# Altium PCB PCB1.PcbDoc
Units mil, origin at the board's own origin, x right, y up, seen from the top; angles counter-clockwise.
Board outline 6000 x 4000 mil, 2 copper layers (Top Layer, Bottom Layer); 185 components, 0 nets, 592 pads, 17 vias.
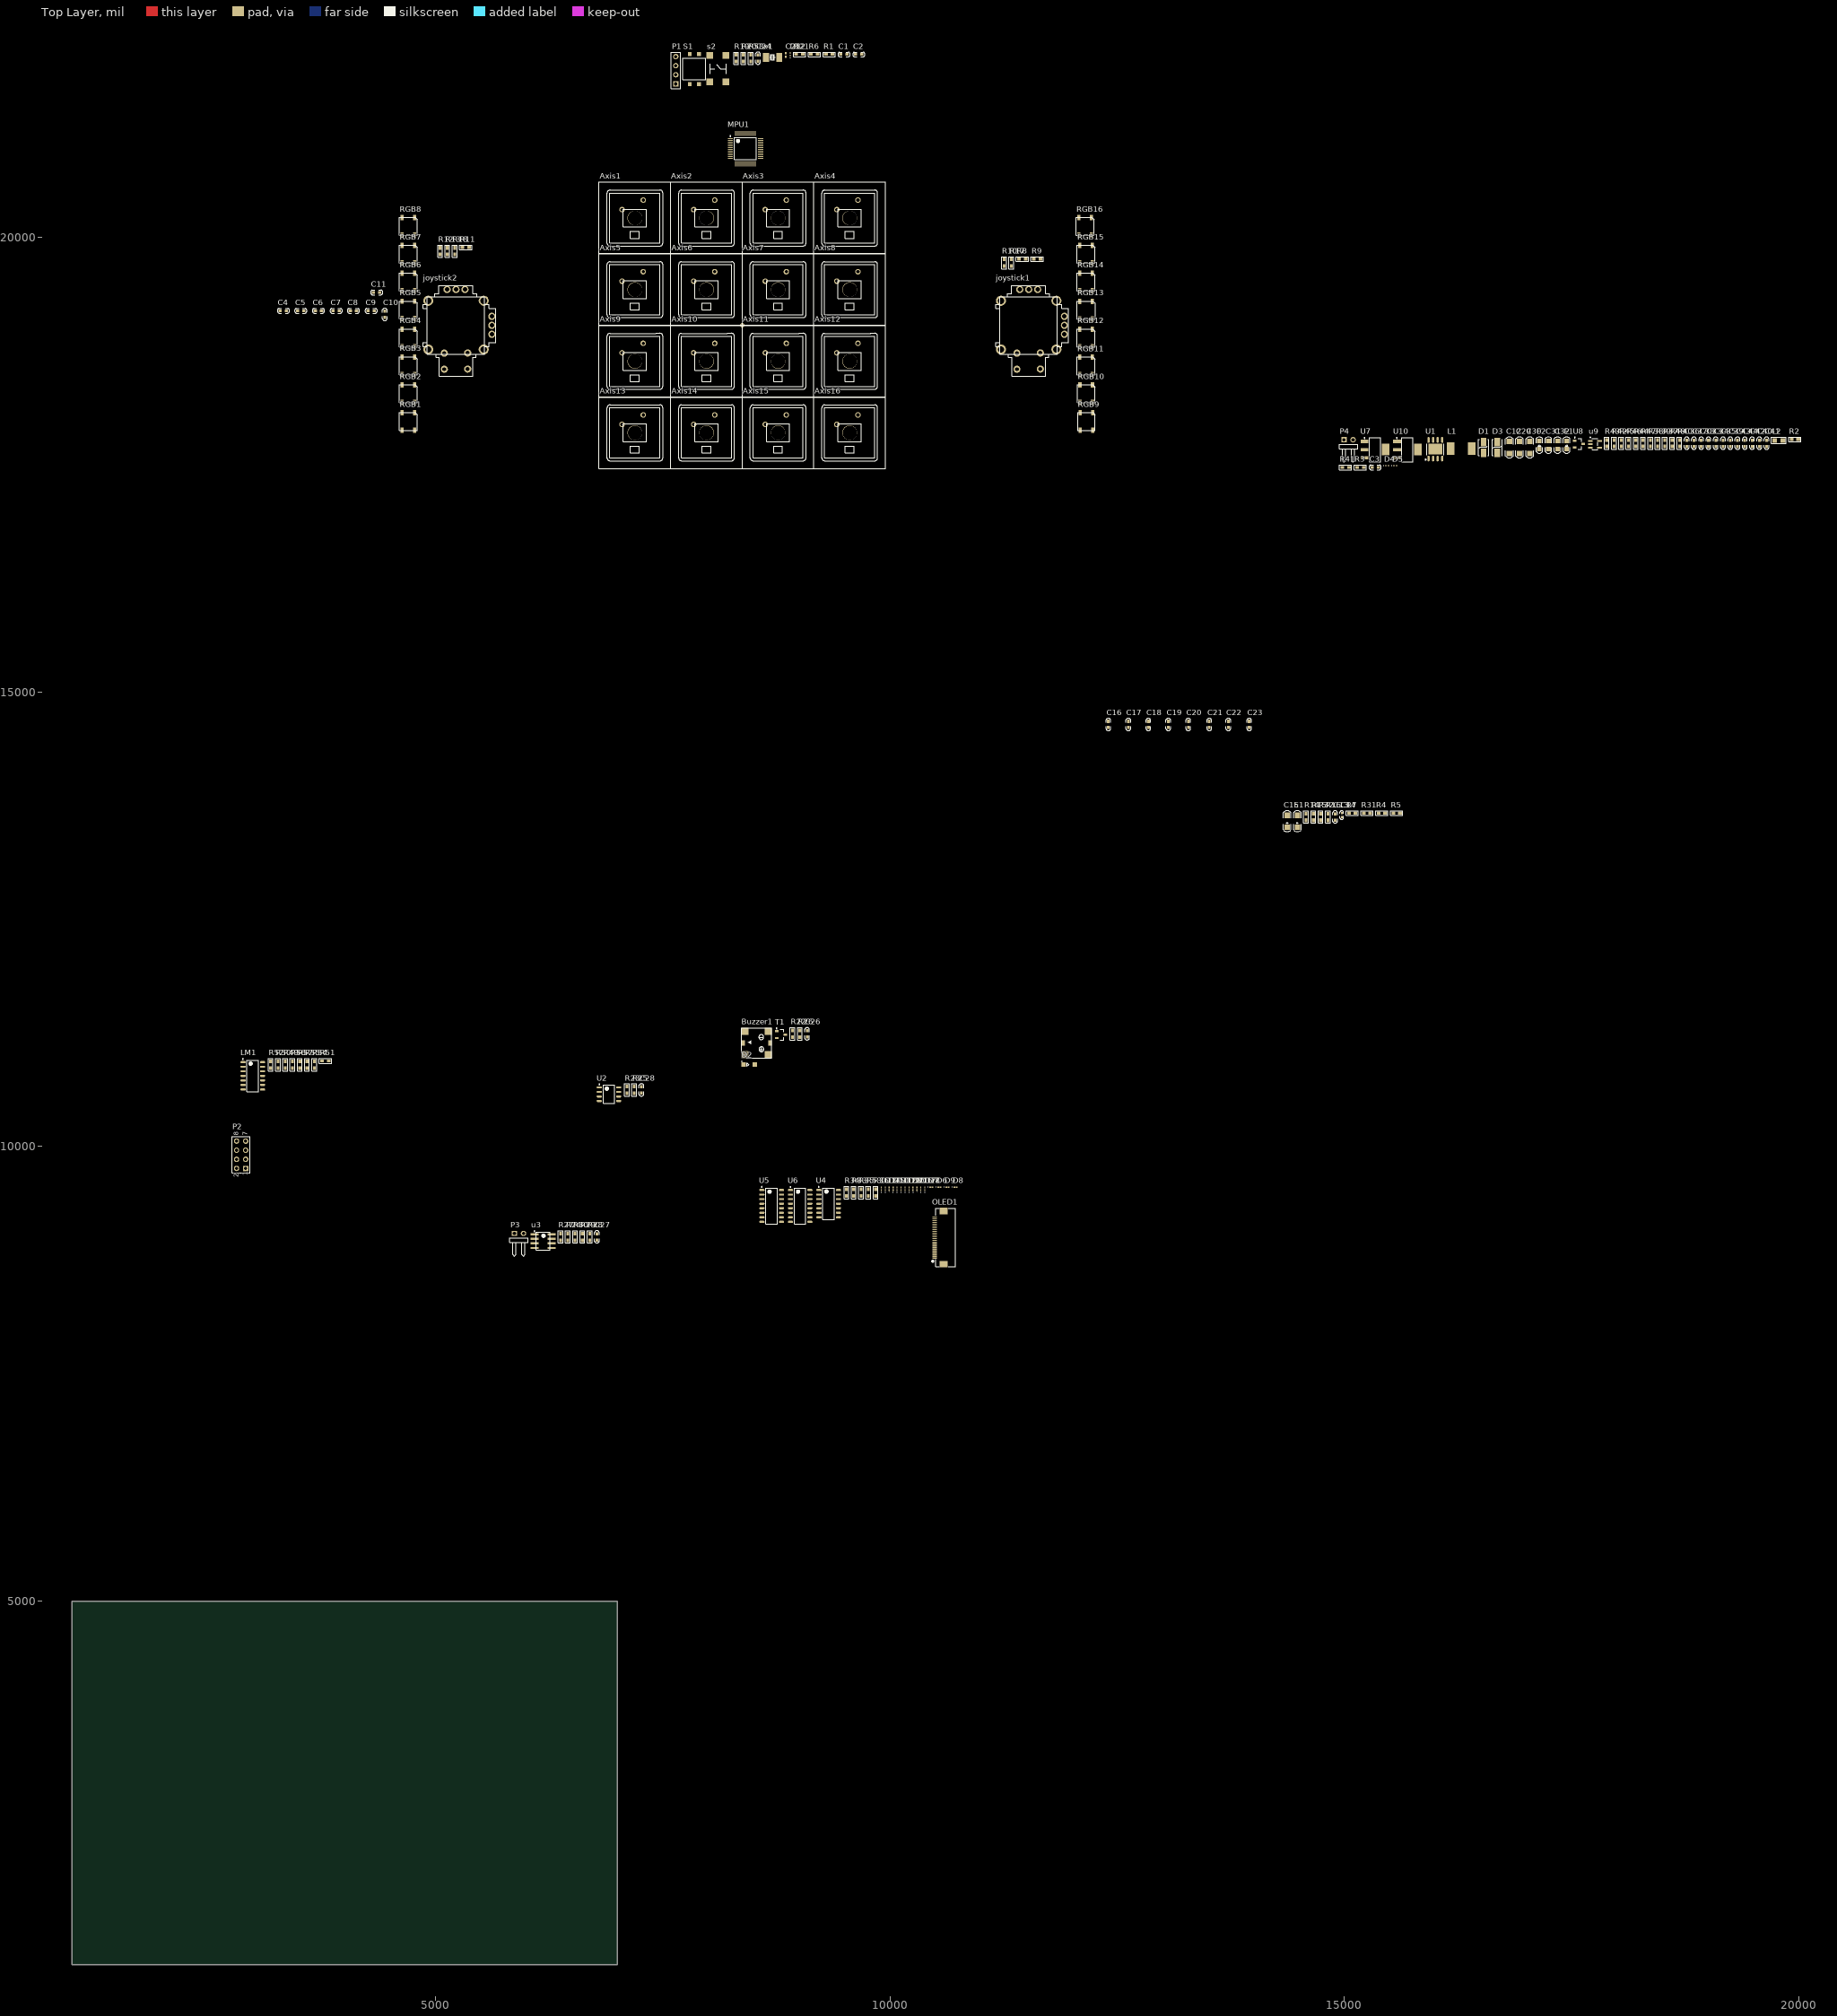
[diagram p0: Top Layer view]
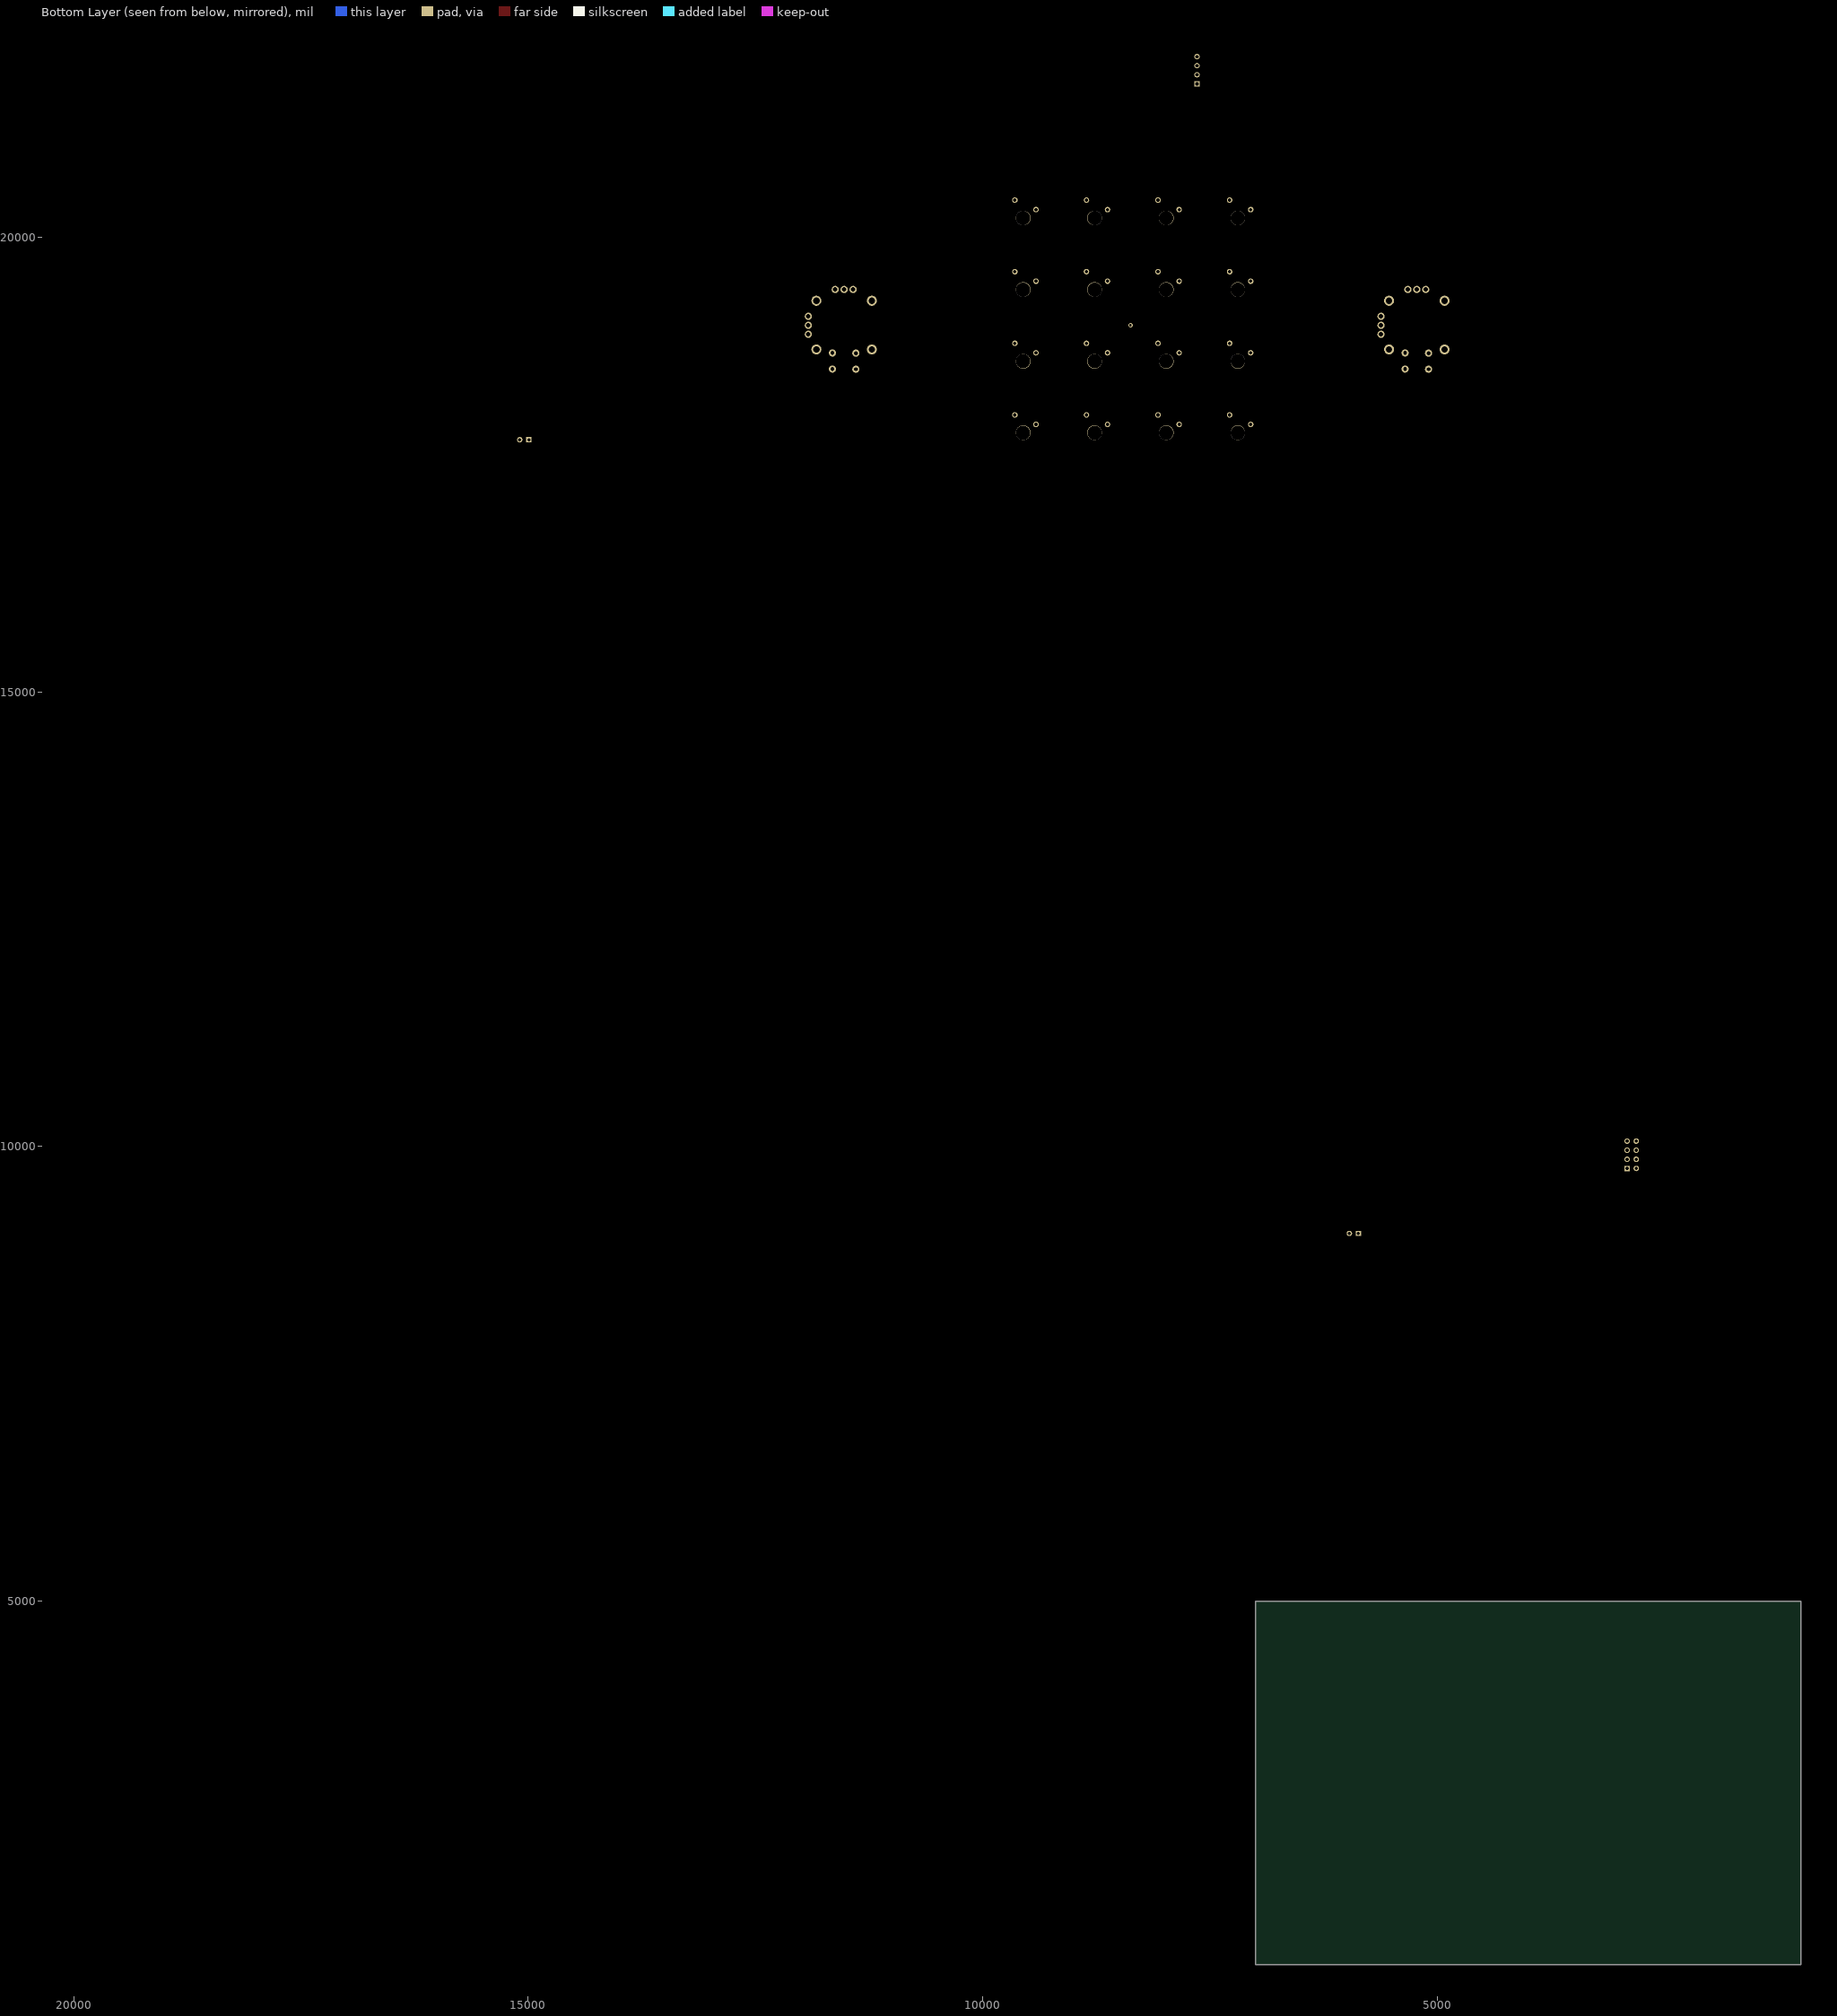
[diagram p1: Bottom Layer view, seen from below]

## Layer stack, top to bottom
Top Solder: solder mask 0.4, Solder Resist, Dk 3.5
Top Layer: signal copper 1.4
Dielectric 1: dielectric 12.6, FR-4, Dk 4.8
Bottom Layer: signal copper 1.4
Bottom Solder: solder mask 0.4, Solder Resist, Dk 3.5

## Board outline
1000,1000 7000,1000 7000,5000 1000,5000

## Design rules (kind name [scope] priority, off if disabled: settings)
Clearance [All] p1: gap=10 ignorepadtopadclearanceinfootprint=FALSE except(0: Arc-Hole Track-Hole SMDPad-Hole THPad-Hole Via-Hole Fill-Hole Poly-Hole Region-Hole Text-Hole)
PolygonConnect [All] p1: connectstyle=Relief reliefconductorwidth=10 reliefentries=4 polygonreliefangle="90 Angle" airgapwidth=10
RoutingVias [All] p1: holewidth=28 width=50 viastyle="Through Hole" minholewidth=28 minwidth=50 maxholewidth=28 maxwidth=50
SolderMaskExpansion [All] p1: expansion=4
Width [All] p1: maxlimit=10 minlimit=10 preferedwidth=10
30 further rules are at their usual default settings.

## Components (designator, comment, footprint, x,y, rotation, side; value= is the part's Value field where it differs from the comment)
Axis1 "keyboard_axis" KEY_AXIS 7195,20209.9 r0 top
Axis2 "keyboard_axis" KEY_AXIS 7982.4,20209.91 r0 top
Axis3 "keyboard_axis" KEY_AXIS 8769.8,20209.91 r0 top
Axis4 "keyboard_axis" KEY_AXIS 9557.2,20209.91 r0 top
Axis5 "keyboard_axis" KEY_AXIS 7195,19422.5 r0 top
Axis6 "keyboard_axis" KEY_AXIS 7982.4,19422.5 r0 top
Axis7 "keyboard_axis" KEY_AXIS 8769.8,19422.5 r0 top
Axis8 "keyboard_axis" KEY_AXIS 9557.2,19422.5 r0 top
Axis9 "keyboard_axis" KEY_AXIS 7195,18635.1 r0 top
Axis10 "keyboard_axis" KEY_AXIS 7982.4,18635.1 r0 top
Axis11 "keyboard_axis" KEY_AXIS 8769.8,18635.1 r0 top
Axis12 "keyboard_axis" KEY_AXIS 9557.2,18635.1 r0 top
Axis13 "keyboard_axis" KEY_AXIS 7195,17847.7 r0 top
Axis14 "keyboard_axis" KEY_AXIS 7982.4,17847.7 r0 top
Axis15 "keyboard_axis" KEY_AXIS 8769.8,17847.7 r0 top
Axis16 "keyboard_axis" KEY_AXIS 9557.2,17847.7 r0 top
Buzzer1 "Buzzer_8530" BUZZER_8530 8532.37,11136.99 r0 top
C1 "22pF" "C 0603" 9494.34,22009.06 r0 top
C2 "22pF" "C 0603" 9657.25,22009.06 r0 top
C3 "100nF" "C 0603" 15337.46,17467.6 r0 top
C4 "100pF" "C 0603" 3328.5,19190 r0 top
C5 "100pF" "C 0603" 3518.5,19190 r0 top
C6 "100pF" "C 0603" 3713.5,19190 r0 top
C7 "100pF" "C 0603" 3908.5,19190 r0 top
C8 "100pF" "C 0603" 4098.5,19190 r0 top
C9 "100pF" "C 0603" 4293.5,19190 r0 top
C10 "100pF" "C 0603" 4443.5,19150 r90 top
C11 "100pF" "C 0603" 4354,19392 r0 top
C12 "10uF/50V 1206" "C 1206" 16813.27,17686.39 r90 top
C13 "4.7uF/16V" "C 0603" 14896.7,13623.54 r90 top
C14 "0.1uF/16V" "C 0402" 14969.64,13644.38 r90 top
C15 "10UF/16V" "C 1206 - POLAR" 14368.94,13576.39 r90 top
C16 "100pF" "C 0603" 12402,14641 r90 top
C17 "100pF" "C 0603" 12622,14641 r90 top
C18 "100pF" "C 0603" 12842,14641 r90 top
C19 "100pF" "C 0603" 13062,14641 r90 top
C20 "100pF" "C 0603" 13282,14641 r90 top
C21 "100pF" "C 0603" 13512,14641 r90 top
C22 "100pF" "C 0603" 13722,14641 r90 top
C23 "100pF" "C 0603" 13952,14641 r90 top
C24 "0.1uF" "C 0603" 8548.23,21967.54 r90 top
C25 "1uf" 0402 8854.51,22001.6 r90 top
C26 "10uF" "C 0603" 9088.5,11238.54 r90 top
C27 "104" "C 0603" 6776.4,9005.54 r90 top
C28 "104" "C 0603" 7266.24,10621.54 r90 top
C29 "22uF/6.3V 1206" "C 1206" 16925.15,17686.39 r90 top
C30 "22uF/6.3V 1206" "C 1206" 17037.03,17686.39 r90 top
C31 "10uF 0805" "C 0805" 17242.78,17712.2 r90 top
C32 "10uF 0805" "C 0805" 17342.66,17712.2 r90 top
C33 "150pF" "C 0603" 19003.57,17733.54 r90 top
C34 "10uF" "C 0603" 19083.44,17733.54 r90 top
C35 "0.1uF" "C 0603" 19163.32,17733.54 r90 top
C36 "0.1uF" "C 0603" 18763.95,17733.54 r90 top
C37 "10uF" "C 0603" 18843.82,17733.54 r90 top
C38 "22pF/16V" "C 0603" 18923.7,17733.54 r90 top
C39 "4.7uF/16V" "C 0603" 19243.19,17733.54 r90 top
C40 "10uF" "C 0603" 19562.69,17733.54 r90 top
C41 "0.1uF" "C 0603" 19642.56,17733.54 r90 top
C42 "10uF" "C 0603" 19482.81,17733.54 r90 top
C43 "0.1uF" "C 0603" 19323.07,17733.54 r90 top
C44 "1uF" "C 0603" 19402.94,17733.54 r90 top
D1 "SS54" DO-214AC/SMA 16529.5,17685.91 r90 top
D2 "Diode" SOD-123FL 8451.54,10900.69 r0 top
D3 "SS54" DO-214AC/SMA 16681.39,17685.91 r90 top
D4 "绿色LED0603" 0603 15468.28,17485.72 r0 top
D5 "绿色LED0603" 0603 15557.18,17485.72 r0 top
D6 "LED" 0603 10543.65,9552.19 r0 top
D7 "LED" 0603 10454.75,9552.19 r0 top
D8 "LED" 0603 10721.45,9552.19 r0 top
D9 "LED" 0603 10632.55,9552.19 r0 top
D10 "LED" 0603 10034.6,9534.47 r90 top
D11 "LED" 0603 10078.22,9534.47 r90 top
D12 "LED" 0603 10121.84,9534.47 r90 top
D13 "LED" 0603 9903.73,9534.47 r90 top
D14 "LED" 0603 9947.35,9534.47 r90 top
D15 "LED" 0603 9990.98,9534.47 r90 top
D16 "LED" 0603 10296.33,9534.47 r90 top
D17 "LED" 0603 10339.95,9534.47 r90 top
D18 "LED" 0603 10383.57,9534.47 r90 top
D19 "LED" 0603 10165.46,9534.47 r90 top
D20 "LED" 0603 10209.09,9534.47 r90 top
D21 "LED" 0603 10252.71,9534.47 r90 top
D22 "LED" 0603 8902.07,22009.47 r90 top
E1 "10UF/16V" "C 1206 - POLAR" 14480.82,13576.39 r90 top
F1 "Fuse" F0805 17442.53,17712.2 r90 top
F2 "Fuse" F0805 17142.91,17712.2 r90 top
joystick1 "joystick" JOYSTICK 11525.61,19030 r0 top
joystick2 "joystick" JOYSTICK 5226.39,19030 r0 top
L1 "10uH 功率电感" 10UH 16166.91,17675.08 r0 top
L2 "22uH" "R 0805" 19777.5,17765 r0 top
LM1 "LM324" LM324 2991.65,10776.69 r0 top
MPU1 "STM32F103C8T6" STM32F103C8T6 8410,20974 r0 top
OLED1 "24PIN插接OLED" "FPC0.5 2H-S-W-24P" 10591,8998 r90 top
P1 "Header 4" HDR1X4 7644.35,21685.06 r90 top
P2 "Header 4X2" HDR2X4 2912.94,9758.68 r90 top
P3 "Header 2H" HDR1X2H 5868.94,9043.47 r0 top
P4 "Header 2H" HDR1X2H 14993.94,17771.47 r0 top
R1 "1M" "R 0603" 9331.38,22009 r0 top
R2 "200K" "R 0603" 19954,17775 r0 top
R3 "15K" "R 0603" 15174.5,17467.54 r0 top
R4 "4.7K" "R 0603" 15410.15,13665 r0 top
R5 "0R" "R 0603" 15573.15,13665 r0 top
R6 "4.7K" "R 0603" 9168.38,22009 r0 top
R7 "4.7K" "R 0603" 15084.15,13665 r0 top
R8 "0R" "R 0603" 11456.5,19759 r0 top
R9 "0R" "R 0603" 11619.5,19759 r0 top
R10 "0R" "R 0603" 11255,19717.5 r90 top
R11 "0R" "R 0603" 5333.5,19887 r0 top
R12 "0R" "R 0603" 5052,19845.5 r90 top
R13 "0R" "R 0603" 5132,19845.5 r90 top
R14 "4.7K" "R 0603" 14576.76,13623.5 r90 top
R15 "4.7K" "R 0603" 14656.76,13623.5 r90 top
R16 "910K" "R 0603" 14816.76,13623.5 r90 top
R17 "10K" "R 0603" 11335,19717.5 r90 top
R18 "10K" "R 0603" 5212,19845.5 r90 top
R19 "10K" "R 0603" 8308.29,21967.5 r90 top
R20 "10K" "R 0603" 8388.29,21967.5 r90 top
R21 "10K" "R 0603" 9005.38,22009 r0 top
R22 "510R" "R 0603" 8928.56,11238.5 r90 top
R23 "4.7K" "R 0603" 7106.31,10621.5 r90 top
R24 "360R" "R 0603" 6456.46,9005.5 r90 top
R25 "4.7K" "R 0603" 7186.31,10621.5 r90 top
R26 "10K" "R 0603" 9008.56,11238.5 r90 top
R27 "0R" "R 0603" 6376.46,9005.5 r90 top
R28 "360R" "R 0603" 6696.46,9005.5 r90 top
R29 "0R" "R 0603" 6616.46,9005.5 r90 top
R30 "120R" "R 0603" 6536.46,9005.5 r90 top
R31 "0R" "R 0603" 15247.15,13665 r0 top
R32 "0R" "R 0603" 14736.76,13623.5 r90 top
R33 "1K" "R 0603" 9601.92,9492.5 r90 top
R34 "1K" "R 0603" 9521.92,9492.5 r90 top
R35 "1K" "R 0603" 9681.92,9492.5 r90 top
R36 "1K" "R 0603" 9841.92,9492.5 r90 top
R37 "100K" "R 0603" 18524.01,17733.5 r90 top
R38 "10R  0.1%" "R 0603" 18364.01,17733.5 r90 top
R39 "560R" "R 0603" 18444.01,17733.5 r90 top
R40 "560R" "R 0603" 18684.01,17733.5 r90 top
R41 "20K 0.1" "R 0603" 15011.5,17467.54 r0 top
R42 "2M" "R 0603" 17964.01,17733.5 r90 top
R43 "100K" "R 0603" 17884.01,17733.5 r90 top
R44 "0R" "R 0603" 18204.01,17733.5 r90 top
R45 "40.2K" "R 0603" 18044.01,17733.5 r90 top
R46 "100K" "R 0603" 18124.01,17733.5 r90 top
R47 "100K 0.1" "R 0603" 18284.01,17733.5 r90 top
R48 "205K" "R 0603" 18604.01,17733.5 r90 top
R49 "100K 0.1%" "R 0603" 3348.31,10898.5 r90 top
R50 "100K 0.1%" "R 0603" 3268.31,10898.5 r90 top
R51 "100K 0.1%" "R 0603" 3789.81,10940 r0 top
R52 "100K 0.1%" "R 0603" 3188.31,10898.5 r90 top
R53 "4.7K" "R 0603" 9761.92,9492.5 r90 top
R54 "100K 0.1%" "R 0603" 3668.31,10898.5 r90 top
R55 "100K 0.1%" "R 0603" 3588.31,10898.5 r90 top
R56 "100K 0.1%" "R 0603" 3428.31,10898.5 r90 top
R57 "100K 0.1%" "R 0603" 3508.31,10898.5 r90 top
R58 "560R" "R 0603" 8468.29,21967.5 r90 top
RGB1 "ws2812" WS2812-5050-4P 4704,17972 r90 top
RGB2 "ws2812" WS2812-5050-4P 4704,18278.67 r90 top
RGB3 "ws2812" WS2812-5050-4P 4704,18585.33 r90 top
RGB4 "ws2812" WS2812-5050-4P 4704,18892 r90 top
RGB5 "ws2812" WS2812-5050-4P 4704,19198.67 r90 top
RGB6 "ws2812" WS2812-5050-4P 4704,19505.33 r90 top
RGB7 "ws2812" WS2812-5050-4P 4704,19812 r90 top
RGB8 "ws2812" WS2812-5050-4P 4704,20118.67 r90 top
RGB9 "ws2812" WS2812-5050-4P 12160,17971.33 r90 top
RGB10 "ws2812" WS2812-5050-4P 12159,18278 r90 top
RGB11 "ws2812" WS2812-5050-4P 12158,18584.67 r90 top
RGB12 "ws2812" WS2812-5050-4P 12156,18891.33 r90 top
RGB13 "ws2812" WS2812-5050-4P 12156,19198 r90 top
RGB14 "ws2812" WS2812-5050-4P 12156,19504.67 r90 top
RGB15 "ws2812" WS2812-5050-4P 12156,19811.33 r90 top
RGB16 "ws2812" WS2812-5050-4P 12147,20118 r90 top
S1 "switch_2p" SWITCH_2P 7848.29,21848.35 r0 top
s2 "key" KEY 8113,21847 r0 top
T1 "S8050" SOT-23-3 8801.79,11229.29 r0 top
U1 "MP1584EN" SOIC-8-EP-150MIL 15999.21,17667.14 r0 top
U2 "AT24C256C" SOIC-8 6909.65,10574.69 r0 top
u3 "sp3485" SP3485 6184.67,8958.69 r0 top
U4 "74HC08" SOIC-14-150MIL 9325.27,9370.69 r0 top
U5 "SN74HC148" SOIC-16-150MIL 8698.65,9345.69 r0 top
U6 "SN74HC148" SOIC-16-150MIL 9011.96,9345.69 r0 top
U7 "AMS1117-3.3" ASM1117 15336.18,17662.28 r0 top
U8 "tl431" SOT-23-3 17579.24,17724.29 r0 top
u9 "TPS61040DBV" SOT-23-5 17705.01,17760.16 r0 top
U10 "AMS1117-3.3" ASM1117 15692.8,17662.28 r0 top
x1 "XTAL" XTAL-5032-2P 8708.46,21976.01 r0 top

## Footprints (in the part's own frame and the unit in brackets; to place one, negate y for a bottom-side part, rotate by r counter-clockwise, add the part's x,y. Pads: shape width x height; smd on the part's side, far side on the other; paste and mask are expansions set on the pad)
10UH [mm] "一体成型电感0630封装"
  rect 2.15x3.5 smd: 24(0,0) 24(5.85,0)
  body extent -0.72,-3.3 6.58,3.3, height 0.25
0402 [mm] "Chip Capacitor, Body 1.0x0.5mm, IPC High Density"
  rect 0.6x0.5 smd: 1(-0.5,0) 2(0.5,0)
  body extent -0.55,-0.3 0.55,0.3, height 1.3
0603 [mm] "Chip Inductor, Body 0.6x0.3mm, IPC High Density"
  rect 0.5x0.3 smd: 1(-0.35,0) 2(0.35,0)
  silkscreen extent -0.9,-0.05 -0.9,0.05, body extent -0.33,-0.18 0.33,0.18, height 0.55
ASM1117 [mm] "SOT223, 4-Leads, Body 6.51x7.00mm (avg), Pitch 2.30mm, IPC Medium Density"
  rect 2.15x0.9 smd: 1(-2.93,2.3) 2(-2.93,0) 3(-2.93,-2.3)
  rect 2.15x3.25 smd: 4(2.93,0)
  silkscreen extent -3.05,-3.35 1.55,3.42, body extent -1.86,-3.35 1.86,3.35, height 1.8
BUZZER_8530 [mm]
  rect 2x2 smd: 1(3.242,-3.217) 2(3.251,3.26) ""(-3.277,-3.267) ""(-3.242,3.267)
  rect 1x1.6 smd: ""(-3.759,0.009) ""(3.759,0.009)
  silkscreen extent -4.24,-4.23 4.26,4.27, body extent -4.24,-4.23 4.26,4.27, height 0.25
"C 0402" [mil] "无极性贴片电容"
  rect 25x20 smd: 1(-23,0.16) 2(23,0.16)
  silkscreen extent -48,-20 48,20, body extent -20,-10 20,10, height 20
"C 0603" [mil] "无极性贴片电容"
  rect 35x30 smd: 1(-35,0) 2(34,0)
  silkscreen extent -67,-26 67,26, body extent -31,-16 31,16, height 32
"C 0805" [mil] "无极性贴片电容"
  rect 50x50 smd: 1(-45,0) 2(45,0)
  silkscreen extent -89,-36 89,36, body extent -39,-24 39,24, height 20
"C 1206" [mil] "无极性贴片电容"
  rect 60x60 smd: 1(-65,0) 2(65,0)
  silkscreen extent -115,-42 115,42, body extent -63,-32 63,32, height 48
"C 1206 - POLAR" [mil] "钽电容"
  rect 60x60 smd: 1(-65,0) 2(65,0)
  silkscreen extent -115,-42 115,42, body extent -63,-32 63,32, height 48
DO-214AC/SMA [mm] "SS54"
  rect 2.4x1.6 smd: 1(-1.525,0) 2(1.525,0)
  silkscreen extent -2.25,-1.4 2.25,1.4, body extent -2.25,-1.4 2.25,1.4, height 2.42
F0805 [mil] "自恢复保险丝"
  rect 50x50 smd: 1(-45,0) 2(45,0)
  silkscreen extent -89,-36 89,36, body extent -39,-24 39,24, height 20
"FPC0.5 2H-S-W-24P" [mm] "长：16.2mm，宽：5.2mm，高：2mm"
  rect 1.8x2.2 smd: 0(-7.4,0) 0(7.4,0)
  rect 0.3x1.3 smd: 1(-5.75,2.497) 2(-5.25,2.497) 3(-4.75,2.497) 4(-4.25,2.497) 5(-3.75,2.497) 6(-3.25,2.497) 7(-2.75,2.497) 8(-2.25,2.497) 9(-1.75,2.497) 10(-1.25,2.497) 11(-0.75,2.497) 12(-0.25,2.497) 13(0.25,2.497) 14(0.75,2.497) 15(1.25,2.497) 16(1.75,2.497) 17(2.25,2.497) 18(2.75,2.497) 19(3.25,2.497) 20(3.75,2.497) 21(4.25,2.497) 22(4.75,2.497) 23(5.25,2.497) 24(5.75,2.497)
  silkscreen extent -8.18,-3.3 8.18,3.23, body extent -8.1,-3.15 8.1,2.85, height 2
HDR1X2H [mm] "Connector; Header; 2 Position; Right Angle"
  rect 1.5x1.5 hole 0.9: 1(0,0)
  round 1.5 hole 0.9: 2(2.54,0)
  silkscreen extent -1.27,-6.35 3.81,-1.27
HDR1X4 [mm] "Connector; Header; 4 Position"
  rect 1.5x1.5 hole 0.9: 1(0,0)
  round 1.5 hole 0.9: 2(2.54,0) 3(5.08,0) 4(7.62,0)
  silkscreen extent -1.27,-1.27 8.89,1.27
HDR2X4 [mm] "Connector; Header; 4x2 Position"
  rect 1.5x1.5 hole 0.9: 1(0,0)
  round 1.5 hole 0.9: 2(0,2.54) 3(2.54,0) 4(2.54,2.54) 5(5.08,0) 6(5.08,2.54) 7(7.62,0) 8(7.62,2.54)
  silkscreen extent -1.27,-1.27 8.89,3.81
JOYSTICK [mm]
  round 2 hole 1.25: 1(-2.5,10) 2(0,10) 3(2.5,10) 4(10,2.5) 5(10,0) 6(10,-2.5)
  round 2 hole 1.1: J1(-3.277,-12.268) J1(3.274,-12.222) J2(-3.277,-7.768) J2(3.274,-7.722)
  round 2.8 hole 1.8: ""(-7.753,-6.731) ""(-7.753,6.858) ""(7.747,-6.731) ""(7.747,6.858)
  silkscreen extent -9.2,-14.2 11.1,11.1, body extent -9.4,-14.35 11.18,11.18, height 0.25
KEY [mm]
  rect 1.9x1.85 smd: 1(-2.377,-3.548) 1(-2.377,3.802) 2(2.123,-3.548) 2(2.123,3.802)
  silkscreen extent -2.35,-1.32 2.22,1.48, body extent -3.43,-4.57 3.17,4.83, height 0.25
KEY_AXIS [mm]
  round 1.524 hole 0.9: 1(-3.6,2.35) 2(2.3,5)
  silkscreen extent -10,-10 10,10.1, body extent -7.87,-7.87 7.87,7.87, height 0.25
LM324 [mm] "SOIC, 14-Leads, Body 8.65x3.90mm, Pitch 1.27mm, IPC Medium Density"
  oval 1.45x0.6 smd: 1(-2.725,3.81) 2(-2.725,2.54) 3(-2.725,1.27) 4(-2.725,0) 5(-2.725,-1.27) 6(-2.725,-2.54) 7(-2.725,-3.81) 8(2.725,-3.81) 9(2.725,-2.54) 10(2.725,-1.27) 11(2.725,0) 12(2.725,1.27) 13(2.725,2.54) 14(2.725,3.81)
  silkscreen extent -2.85,-4.4 1.6,4.78, body extent -2,-4.4 2,4.4, height 1.75
"R 0603" [mil] "1/10W贴片电阻"
  rect 40x31.5 smd: 1(-36.5,0) 2(36.5,0)
  silkscreen extent -68,-26 68,26, body extent -31,-16 32,16, height 16
"R 0805" [mil] "1/8W贴片电阻"
  rect 50x50 smd: 1(-45,0) 2(45,0)
  silkscreen extent -81,-36 81,36, body extent -39,-25 39,25, height 20
SOD-123FL [mm] "SODFL, 2-Leads, Body 1.80x3.70mm, IPC Medium Density"
  rect 1.25x1.2 smd: 1(-1.525,0) 2(1.525,0)
  silkscreen extent -2.1,-0.41 -0.18,0.95, body extent -1.45,-0.95 1.45,0.95, height 1.1
SOIC-8 [mm] "SOIC, 8-Leads, Body 4.93x3.90mm, Pitch 1.27mm, IPC Medium Density"
  oval 1.45x0.6 smd: 1(-2.725,1.905) 2(-2.725,0.635) 3(-2.725,-0.635) 4(-2.725,-1.905) 5(2.725,-1.905) 6(2.725,-0.635) 7(2.725,0.635) 8(2.725,1.905)
  silkscreen extent -2.85,-2.55 1.6,2.88, body extent -2,-2.55 2,2.55, height 1.75
SOIC-8-EP-150MIL [mm]
  rect 4x3 smd: 0(0,0)
  oval 0.6x1.6 smd: 1(-1.905,-2.6) 2(-0.635,-2.6) 3(0.635,-2.6) 4(1.905,-2.6) 5(1.905,2.6) 6(0.635,2.6) 7(-0.635,2.6) 8(-1.905,2.6)
  silkscreen extent -2.85,-3.05 2.4,1.5
SOIC-14-150MIL [mm] "SOIC, 14-Leads, Body 8.65x3.90mm, Pitch 1.27mm, IPC Medium Density"
  oval 1.45x0.6 smd: 1(-2.725,3.81) 2(-2.725,2.54) 3(-2.725,1.27) 4(-2.725,0) 5(-2.725,-1.27) 6(-2.725,-2.54) 7(-2.725,-3.81) 8(2.725,-3.81) 9(2.725,-2.54) 10(2.725,-1.27) 11(2.725,0) 12(2.725,1.27) 13(2.725,2.54) 14(2.725,3.81)
  silkscreen extent -2.85,-4.4 1.6,4.78, body extent -2,-4.4 2,4.4, height 1.75
SOIC-16-150MIL [mm] "SOIC, 16-Leads, Body 9.90x3.90mm, Pitch 1.27mm, IPC Medium Density"
  oval 1.45x0.6 smd: 1(-2.725,4.445) 2(-2.725,3.175) 3(-2.725,1.905) 4(-2.725,0.635) 5(-2.725,-0.635) 6(-2.725,-1.905) 7(-2.725,-3.175) 8(-2.725,-4.445) 9(2.725,-4.445) 10(2.725,-3.175) 11(2.725,-1.905) 12(2.725,-0.635) 13(2.725,0.635) 14(2.725,1.905) 15(2.725,3.175) 16(2.725,4.445)
  silkscreen extent -2.85,-5 1.6,5.42, body extent -2,-5 2,5, height 1.75
SOT-23-3 [mm] "SOT23, 3-Leads, Body 2.90x2.45mm, Pitch 0.95mm, IPC Medium Density"
  rect 1x0.6 smd: 1(-1.2,0.95) 2(-1.2,-0.95) 3(1.2,0)
  silkscreen extent -1.32,-1.5 0.7,1.92, body extent -0.7,-1.5 0.7,1.5, height 1.1
SOT-23-5 [mil]
  rect 50x20 smd: 1(0,0) 2(0,-37.4) 3(0,-74.8) 4(100,-74.8) 5(100,0)
  silkscreen extent 0,-99 80,35
SP3485 [mm] "SOIC, 8-Leads, Body 5.0x4.0mm (max), Pitch 1.27mm"
  rect 2.2x0.6 smd: 1(-2.4,1.905) 2(-2.4,0.635) 3(-2.4,-0.635) 4(-2.4,-1.905) 5(2.4,-1.905) 6(2.4,-0.635) 7(2.4,0.635) 8(2.4,1.905)
  silkscreen extent -2.52,-2.5 1.93,2.88, body extent -2,-2.5 2,2.5, height 1.75
STM32F103C8T6 [mm] "TSQFP, 48-Leads, Body 7.00x7.00mm, Pitch 0.50mm, IPC Medium Density"
  oval 1.45x0.3 smd: 1(-4.225,2.75) 2(-4.225,2.25) 3(-4.225,1.75) 4(-4.225,1.25) 5(-4.225,0.75) 6(-4.225,0.25) 7(-4.225,-0.25) 8(-4.225,-0.75) 9(-4.225,-1.25) 10(-4.225,-1.75) 11(-4.225,-2.25) 12(-4.225,-2.75) 25(4.225,-2.75) 26(4.225,-2.25) 27(4.225,-1.75) 28(4.225,-1.25) 29(4.225,-0.75) 30(4.225,-0.25) 31(4.225,0.25) 32(4.225,0.75) 33(4.225,1.25) 34(4.225,1.75) 35(4.225,2.25) 36(4.225,2.75)
  oval 0.3x1.45 smd: 13(-2.75,-4.225) 14(-2.25,-4.225) 15(-1.75,-4.225) 16(-1.25,-4.225) 17(-0.75,-4.225) 18(-0.25,-4.225) 19(0.25,-4.225) 20(0.75,-4.225) 21(1.25,-4.225) 22(1.75,-4.225) 23(2.25,-4.225) 24(2.75,-4.225) 37(2.75,4.225) 38(2.25,4.225) 39(1.75,4.225) 40(1.25,4.225) 41(0.75,4.225) 42(0.25,4.225) 43(-0.25,4.225) 44(-0.75,4.225) 45(-1.25,4.225) 46(-1.75,4.225) 47(-2.25,4.225) 48(-2.75,4.225)
  silkscreen extent -4.35,-3.1 3.1,3.57, body extent -3.5,-3.5 3.5,3.5, height 1.6
SWITCH_2P [mm]
  rect 1.1x1.1 smd: 1(-1.27,4.191) 2(-1.27,-4.191) 3(1.27,4.191) 4(1.27,-4.191)
  silkscreen extent -3.2,-3 3.2,3.05, body extent -3.3,-4.83 3.3,4.83, height 0.25
WS2812-5050-4P [mm] "RGB集成光源"
  rect 1.5x0.9 smd: 1(-2.438,1.753) 2(-2.438,-1.75) 3(2.438,-1.753) 4(2.438,1.747)
  silkscreen extent -2.5,-2.47 2.5,2.5, body extent -2.97,-2.49 3,2.49, height 0.25
XTAL-5032-2P [mm]
  rect 1.7x2.4 smd: 1(-1.85,0) 2(1.85,0)
  silkscreen extent -0.72,-0.77 0.72,0.87, body extent -2.5,-1.6 2.5,1.6, height 0.25

## Part data
C1 C2 C3 C4 C5 C6 C7 C8 C9 C10 C11 C12 C13 C14 C16 C17 C18 C19 C20 C21 C22 C23 C24 C26 C27 C28 C29 C30 C31 C32 C33 C34 C35 C36 C37 C38 C39 C40 C41 C42 C43 C44: library part C, "无极性贴片电容", BOM名称=无极性贴片电容, 学习资源=www.ooocke.com, 版权归属=源创客
C15 E1: library part C-CAP, "直插电解电容", BOM名称=直插电解电容, 学习资源=www.ooocke.com, 版权归属=源创客
C25: library part C
D1 D3: library part "Schottky Diode", "肖特基二极管", Package=SOD-123, SuppliersPartNumber=C8598, ComponentLink1Description=供应商链接, ComponentLink1URL=http://www.szlcsc.com/product/details_9093.html, Supplier=LC
D2: "二极管", Package=SMA(DO-214AC), SuppliersPartNumber=C95872, ComponentLink1Description=供应商链接, ComponentLink1URL=http://www.szlcsc.com/product/details_2841.html, Supplier=LC, 备注="1N4007 4007 编号C2464 已经停售, 使用新物料编号C95872"
D4 D5: library part LED, "发光二极管"
D6 D7 D8 D9 D10 D11 D12 D13 D14 D15 D16 D17 D18 D19 D20 D21 D22: "发光二极管"
F1 F2: "自恢复保险丝"
L1 L2: library part L, "小功率贴片电感", BOM名称=小功率贴片电感, 学习资源=www.ooocke.com, 版权归属=源创客
MPU1: "mcu"
P1: "Header, 4-Pin", LatestRevisionDate=17-Jul-2002, LatestRevisionNote="Re-released for DXP Platform.", Publisher="Altium Limited"
P2: "Header, 4-Pin, Dual row", LatestRevisionDate=17-Jul-2002, LatestRevisionNote="Re-released for DXP Platform.", Publisher="Altium Limited"
P3 P4: "Header, 2-Pin, Right Angle", LatestRevisionDate=17-Jul-2002, LatestRevisionNote="Re-released for DXP Platform.", Publisher="Altium Limited"
R1 R4 R5 R7 R8 R9 R10 R11 R12 R13 R14 R15 R16 R17 R18 R22 R23 R24 R25 R26 R27 R28 R29 R30 R31 R32 R38 R41 R42 R44 R47 R48: library part R, "贴片电阻", BOM名称=贴片电阻, 学习资源=www.ooocke.com, 版权归属=源创客
R2 R3 R6 R19 R20 R21 R37 R39 R40 R43 R45 R46 R49 R50 R51 R52 R53 R54 R55 R56 R57 R58: library part R
R33 R34 R35 R36: library part RA, "排阻"
RGB1 RGB2 RGB3 RGB4 RGB5 RGB6 RGB7 RGB8 RGB9 RGB10 RGB11 RGB12 RGB13 RGB14 RGB15 RGB16: "RGB集成光源"
T1: library part Triode, "NPN"
U1: "电源IC"
U2: "256KBIT_EEPROM", BOM名称=外置EEPROM, 学习资源=www.ooocke.com, 版权归属=源创客
U5 U6: "8-3encoder"
U8: "精密电压基准ic"
u9: "DC-DC(BUCK)"

## Via types
v1: diameter 161.42, hole 157.48, Top Layer to Bottom Layer, tented both sides, 16 vias
v2: diameter 50, hole 28, Top Layer to Bottom Layer, 1 vias

## Nets (pads, with @x,y where several pads share a name; then routed paths per layer and width w, separated by ;. In a path a pad name is that pad's centre, name@x,y a point inside that pad or via, vN(x,y) a via of type N, cw(c..) or ccw(c..) an arc to the next point about the centre after c; other vN are vias at no path point)
pads on no net: Axis1.1 Axis1.2 Axis2.1 Axis2.2 Axis3.1 Axis3.2 Axis4.1 Axis4.2 Axis5.1 Axis5.2 Axis6.1 Axis6.2 Axis7.1 Axis7.2 Axis8.1 Axis8.2 Axis9.1 Axis9.2 Axis10.1 Axis10.2 Axis11.1 Axis11.2 Axis12.1 Axis12.2 Axis13.1 Axis13.2 Axis14.1 Axis14.2 Axis15.1 Axis15.2 Axis16.1 Axis16.2 Buzzer1. Buzzer1.1 Buzzer1.2 C1.1 C1.2 C2.1 C2.2 C3.1 C3.2 C4.1 C4.2 C5.1 C5.2 C6.1 C6.2 C7.1 C7.2 C8.1 C8.2 C9.1 C9.2 C10.1 C10.2 C11.1 C11.2 C12.1 C12.2 C13.1 C13.2 C14.1 C14.2 C15.1 C15.2 C16.1 C16.2 C17.1 C17.2 C18.1 C18.2 C19.1 C19.2 C20.1 C20.2 C21.1 C21.2 C22.1 C22.2 C23.1 C23.2 C24.1 C24.2 C25.1 C25.2 C26.1 C26.2 C27.1 C27.2 C28.1 C28.2 C29.1 C29.2 C30.1 C30.2 C31.1 C31.2 C32.1 C32.2 C33.1 C33.2 C34.1 C34.2 C35.1 C35.2 C36.1 C36.2 C37.1 C37.2 C38.1 C38.2 C39.1 C39.2 C40.1 C40.2 C41.1 C41.2 C42.1 C42.2 C43.1 C43.2 C44.1 C44.2 D1.1 D1.2 D2.1 D2.2 D3.1 D3.2 D4.1 D4.2 D5.1 D5.2 D6.1 D6.2 D7.1 D7.2 D8.1 D8.2 D9.1 D9.2 D10.1 D10.2 D11.1 D11.2 D12.1 D12.2 D13.1 D13.2 D14.1 D14.2 D15.1 D15.2 D16.1 D16.2 D17.1 D17.2 D18.1 D18.2 D19.1 D19.2 D20.1 D20.2 D21.1 D21.2 D22.1 D22.2 E1.1 E1.2 F1.1 F1.2 F2.1 F2.2 joystick1. joystick1.1 joystick1.2 joystick1.3 joystick1.4 joystick1.5 joystick1.6 joystick1.J1 joystick1.J2 joystick2. joystick2.1 joystick2.2 joystick2.3 joystick2.4 joystick2.5 joystick2.6 joystick2.J1 joystick2.J2 L1.24 L2.1 L2.2 LM1.1 LM1.2 LM1.3 LM1.4 LM1.5 LM1.6 LM1.7 LM1.8 LM1.9 LM1.10 LM1.11 LM1.12 LM1.13 LM1.14 MPU1.1 MPU1.2 MPU1.3 MPU1.4 MPU1.5 MPU1.6 MPU1.7 MPU1.8 MPU1.9 MPU1.10 MPU1.11 MPU1.12 MPU1.13 MPU1.14 MPU1.15 MPU1.16 MPU1.17 MPU1.18 MPU1.19 MPU1.20 MPU1.21 MPU1.22 MPU1.23 MPU1.24 MPU1.25 MPU1.26 MPU1.27 MPU1.28 MPU1.29 MPU1.30 MPU1.31 MPU1.32 MPU1.33 MPU1.34 MPU1.35 MPU1.36 MPU1.37 MPU1.38 MPU1.39 MPU1.40 MPU1.41 MPU1.42 MPU1.43 MPU1.44 MPU1.45 MPU1.46 MPU1.47 MPU1.48 OLED1.0 OLED1.1 OLED1.2 OLED1.3 OLED1.4 OLED1.5 OLED1.6 OLED1.7 OLED1.8 OLED1.9 OLED1.10 OLED1.11 OLED1.12 OLED1.13 OLED1.14 OLED1.15 OLED1.16 OLED1.17 OLED1.18 OLED1.19 OLED1.20 OLED1.21 OLED1.22 OLED1.23 OLED1.24 P1.1 P1.2 P1.3 P1.4 P2.1 P2.2 P2.3 P2.4 P2.5 P2.6 P2.7 P2.8 P3.1 P3.2 P4.1 P4.2 R1.1 R1.2 R2.1 R2.2 R3.1 R3.2 R4.1 R4.2 R5.1 R5.2 R6.1 R6.2 R7.1 R7.2 R8.1 R8.2 R9.1 R9.2 R10.1 R10.2 R11.1 R11.2 R12.1 R12.2 R13.1 R13.2 R14.1 R14.2 R15.1 R15.2 R16.1 R16.2 R17.1 R17.2 R18.1 R18.2 R19.1 R19.2 R20.1 R20.2 R21.1 R21.2 R22.1 R22.2 R23.1 R23.2 R24.1 R24.2 R25.1 R25.2 R26.1 R26.2 R27.1 R27.2 R28.1 R28.2 R29.1 R29.2 R30.1 R30.2 R31.1 R31.2 R32.1 R32.2 R33.1 R33.2 R34.1 R34.2 R35.1 R35.2 R36.1 R36.2 R37.1 R37.2 R38.1 R38.2 R39.1 R39.2 R40.1 R40.2 R41.1 R41.2 R42.1 R42.2 R43.1 R43.2 R44.1 R44.2 R45.1 R45.2 R46.1 R46.2 R47.1 R47.2 R48.1 R48.2 R49.1 R49.2 R50.1 R50.2 R51.1 R51.2 R52.1 R52.2 R53.1 R53.2 R54.1 R54.2 R55.1 R55.2 R56.1 R56.2 R57.1 R57.2 R58.1 R58.2 RGB1.1 RGB1.2 RGB1.3 RGB1.4 RGB2.1 RGB2.2 RGB2.3 RGB2.4 RGB3.1 RGB3.2 RGB3.3 RGB3.4 RGB4.1 RGB4.2 RGB4.3 RGB4.4 RGB5.1 RGB5.2 RGB5.3 RGB5.4 RGB6.1 RGB6.2 RGB6.3 RGB6.4 RGB7.1 RGB7.2 RGB7.3 RGB7.4 RGB8.1 RGB8.2 RGB8.3 RGB8.4 RGB9.1 RGB9.2 RGB9.3 RGB9.4 RGB10.1 RGB10.2 RGB10.3 RGB10.4 RGB11.1 RGB11.2 RGB11.3 RGB11.4 RGB12.1 RGB12.2 RGB12.3 RGB12.4 RGB13.1 RGB13.2 RGB13.3 RGB13.4 RGB14.1 RGB14.2 RGB14.3 RGB14.4 RGB15.1 RGB15.2 RGB15.3 RGB15.4 RGB16.1 RGB16.2 RGB16.3 RGB16.4 S1.1 S1.2 S1.3 S1.4 s2.1 s2.2 T1.1 T1.2 T1.3 U1.0 U1.1 U1.2 U1.3 U1.4 U1.5 U1.6 U1.7 U1.8 U2.1 U2.2 U2.3 U2.4 U2.5 U2.6 U2.7 U2.8 u3.1 u3.2 u3.3 u3.4 u3.5 u3.6 u3.7 u3.8 U4.1 U4.2 U4.3 U4.4 U4.5 U4.6 U4.7 U4.8 U4.9 U4.10 U4.11 U4.12 U4.13 U4.14 U5.1 U5.2 U5.3 U5.4 U5.5 U5.6 U5.7 U5.8 U5.9 U5.10 U5.11 U5.12 U5.13 U5.14 U5.15 U5.16 U6.1 U6.2 U6.3 U6.4 U6.5 U6.6 U6.7 U6.8 U6.9 U6.10 U6.11 U6.12 U6.13 U6.14 U6.15 U6.16 U7.1 U7.2 U7.3 U7.4 U8.1 U8.2 U8.3 u9.1 u9.2 u9.3 u9.4 u9.5 U10.1 U10.2 U10.3 U10.4 x1.1 x1.2
copper on no net:
  other v1: 7195,17847.7 7982.4,17847.7 8769.8,17847.7 9557.2,17847.7 7195,18635.1 7982.4,18635.1 8769.8,18635.1 9557.2,18635.1 7195,19422.5 7982.4,19422.5 8769.8,19422.5 9557.2,19422.5 7195,20209.9 7982.4,20209.91 8769.8,20209.91 9557.2,20209.91
  other v2: 8376,19030

## Silkscreen, mask and mechanical layers (free items; w line width, h text height)
Mechanical 1:
  lines w6: 4555,17451 12298,17451 12298,20600.61 12298,21388.01 4555,21388.01 4555,21158 4555,20600.61 4555,17451

## Text inside footprints (layer, text, board x,y; h text height)
P2: Top Overlay "2" at 2832.94,9658.68 h50 r90; Top Overlay "1" at 2932.94,9678.68 h50 r90; Top Overlay "7" at 2932.94,10118.68 h50 r90; Top Overlay "8" at 2832.94,10118.68 h50 r90